# Altium PCB dieukhien.PcbDoc (part 1 of 3)
Units mil, origin at the board's own origin, x right, y up, seen from the top; angles counter-clockwise.
Board outline 7680 x 3350 mil, 2 copper layers (Top Layer, Bottom Layer); 551 components, 172 nets, 1771 pads, 0 vias.
Unrouted connection lines stored in the file: 181.
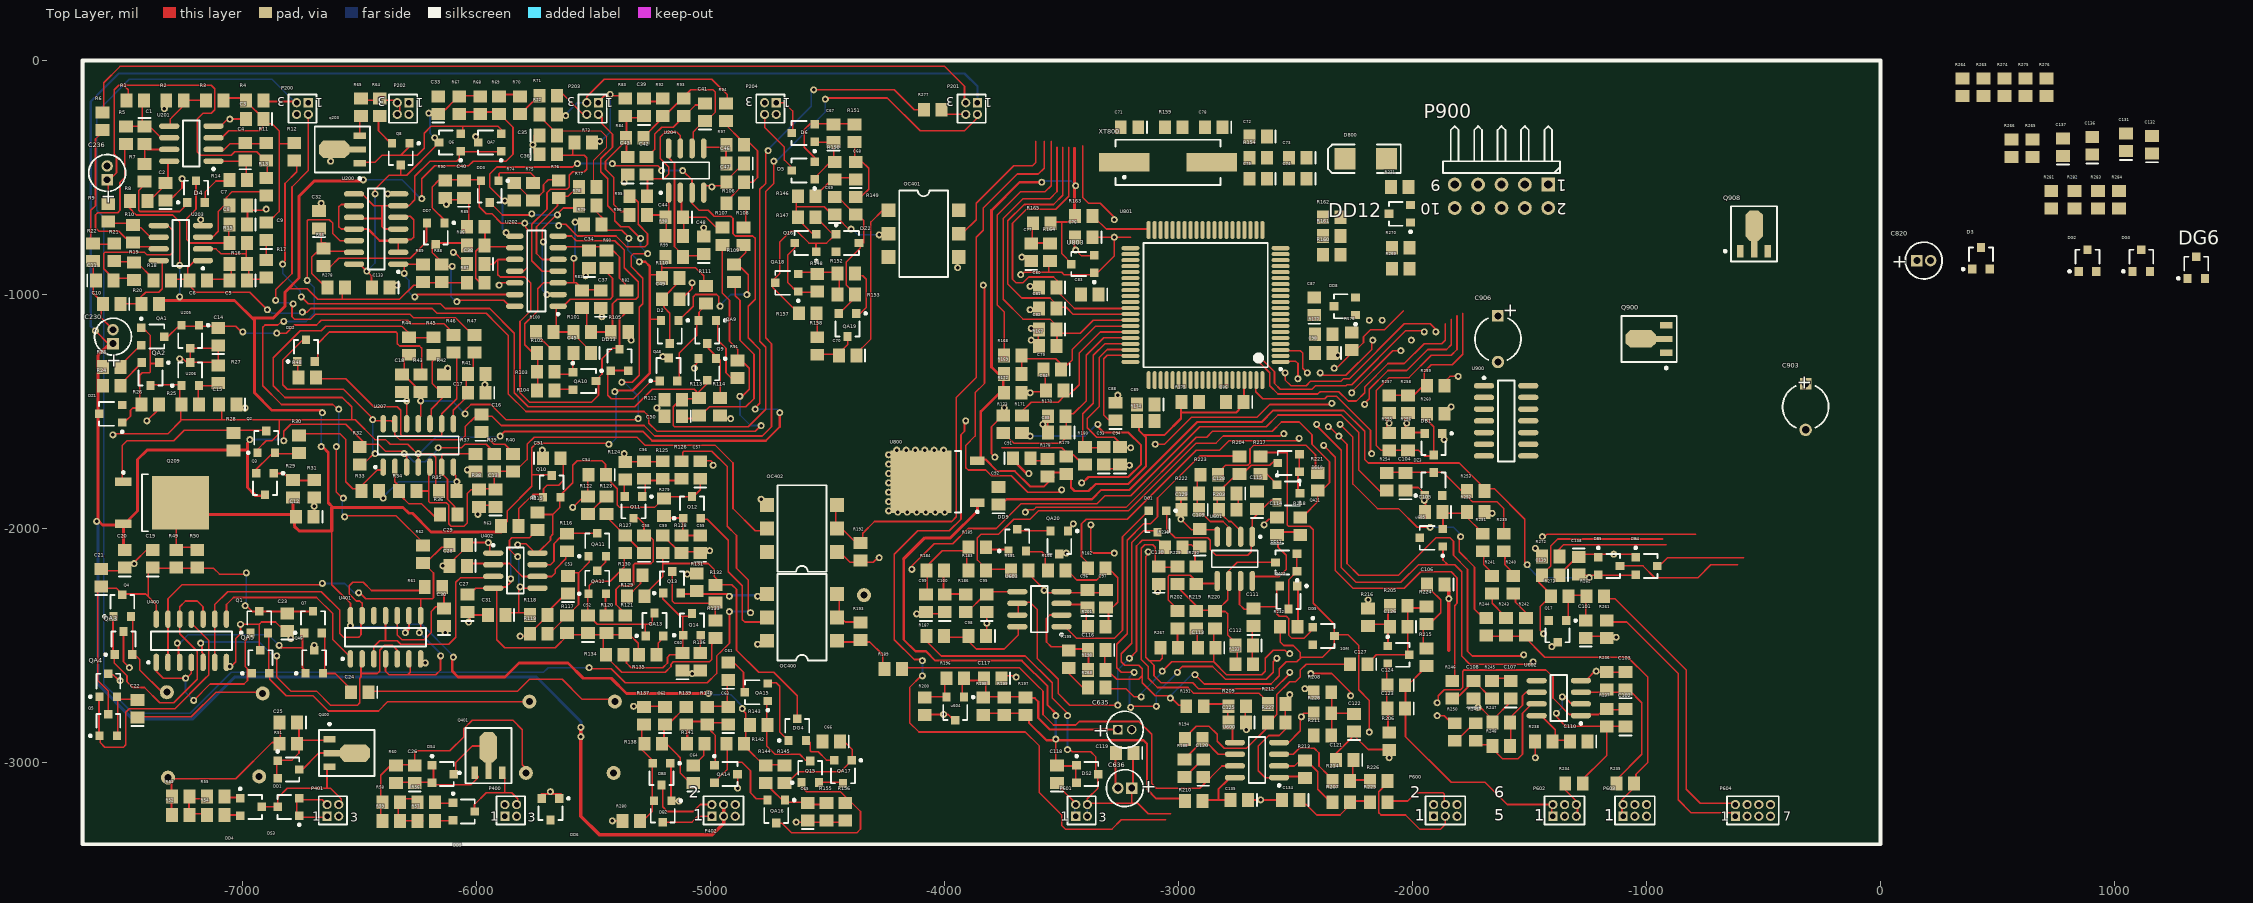
[diagram p0: Top Layer view]
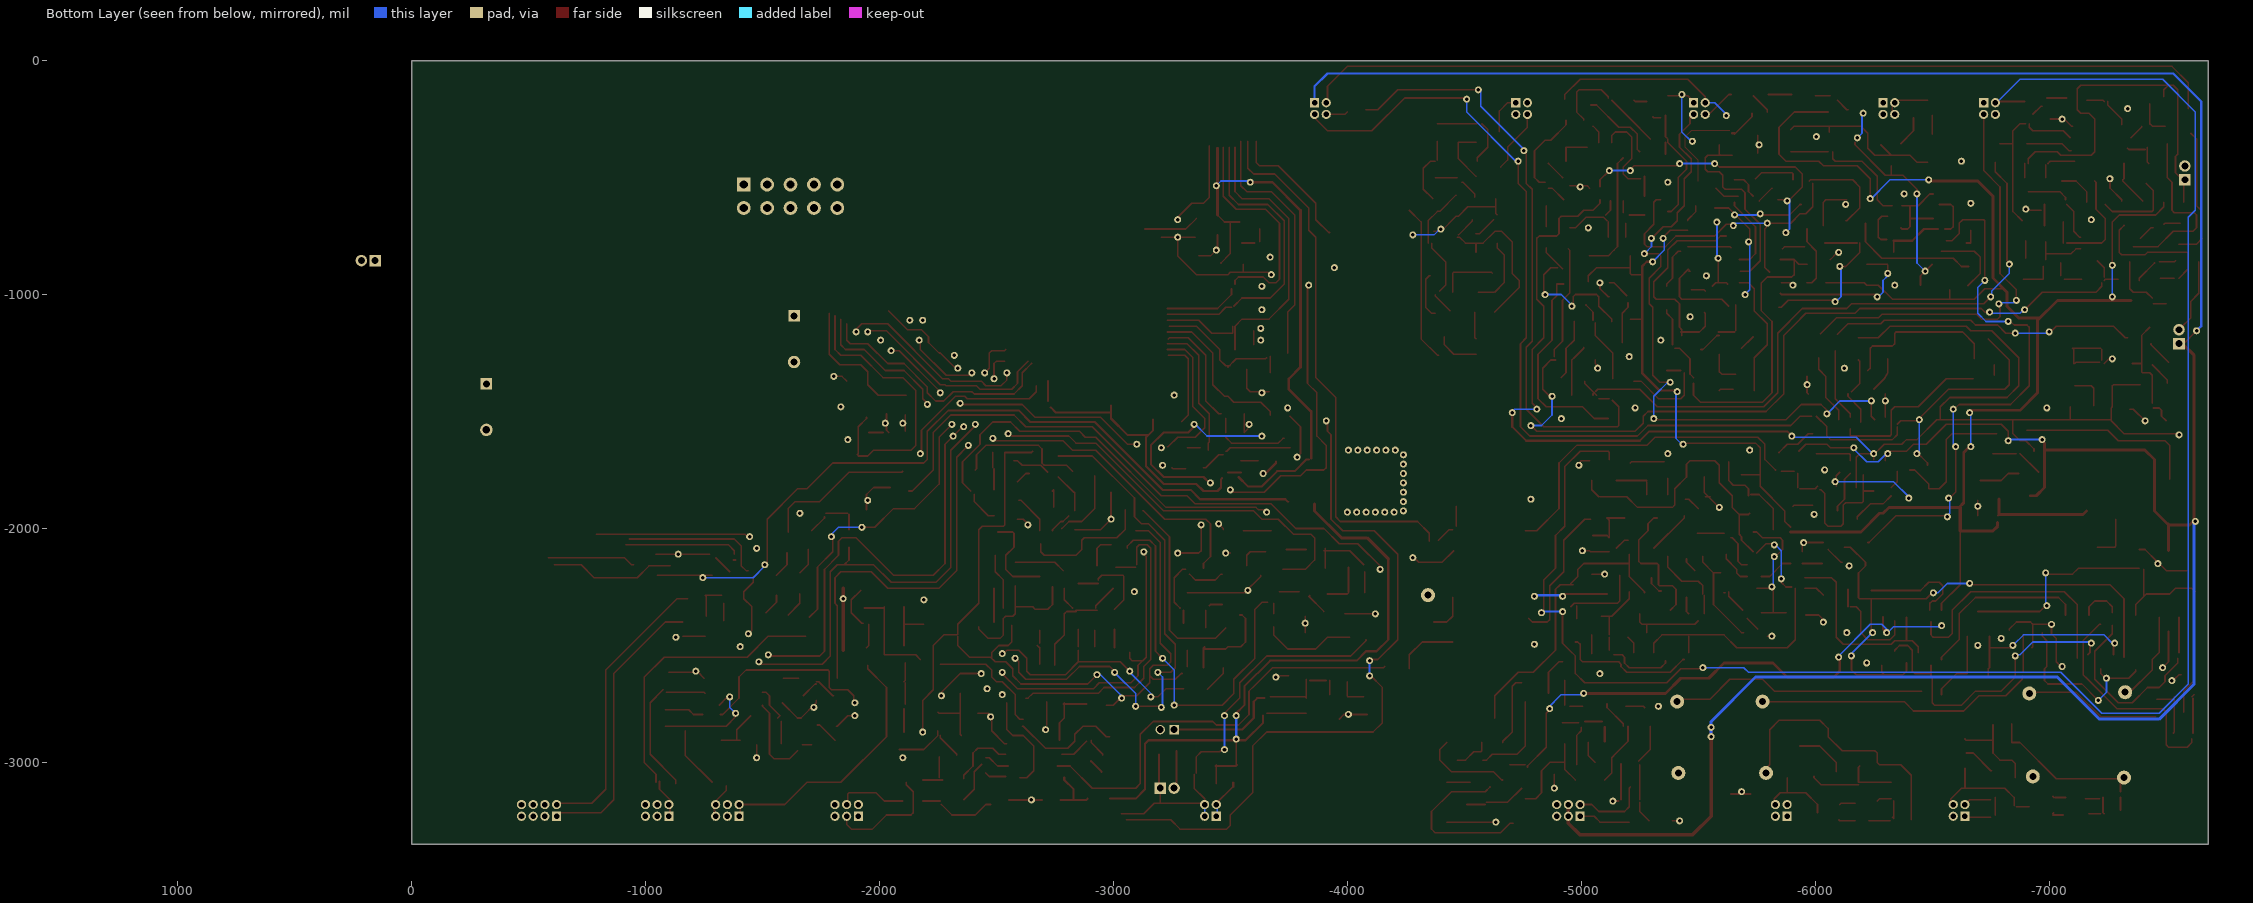
[diagram p1: Bottom Layer view, seen from below]

## Layer stack, top to bottom
Top Layer: signal copper 1.4
Dielectric: dielectric 12.6, FR-4, Dk 4.8
Bottom Layer: signal copper 1.4

## Board outline
-7680,0 0,0 0,-3350 -7680,-3350 -7680,0

## Design rules (kind name [scope] priority, off if disabled: settings)
Clearance [All] p1: gap=2
PolygonConnect [All] p1: connectstyle=Relief reliefconductorwidth=10 reliefentries=4 polygonreliefangle="90 Angle"
RoomDefinition dieukhien [InComponentClass('dieukhien')] p1: confinementstyle=ConfineIn formatcopy=TRUE lockcomponents=FALSE outline 45,-3290 290,-3290 290,-3040 45,-3040
RoutingVias [All] p1: holewidth=28 width=50 viastyle="Through Hole" minholewidth=28 minwidth=50 maxholewidth=28 maxwidth=50
SilkscreenOverComponentPads [All] p1: minsilkscreentomaskgap=10
SolderMaskExpansion [All] p1: expansion=4
TestPointUsage [All] p1: valid=0 allowmultiple=FALSE
Testpoint [All] p1: side=15 testpointundercomponent=TRUE minsize=40 maxsize=100 preferedsize=60 minholesize=0 maxholesize=40 preferedholesize=32 testpointgrid=1 style=1023 order=0123456789
Width [All] p1: maxlimit=10 minlimit=10 preferedwidth=10
23 further rules are at their usual default settings.

## Components (designator, comment, footprint, x,y, rotation, side; value= is the part's Value field where it differs from the comment)
1GM "MMBTA06-1GM" SOT23A -2060,-2540 r270 top
C1 "Cap" C0805 -7420,-320 r270 top
C2 "Cap" C0805 -7330,-560 r90 top
C3 "Cap" C0805 -6950,-250 r180 top
C4 "Cap" C0805 -6990,-390 r90 top
C5 "Cap" C0805 -7020,-940 r180 top
C6 "Cap" C0805 -7190,-940 r0 top
C7 "Cap" C0805 -7020,-620 r180 top
C8 "Cap" C0805 -7020,-700 r180 top
C9 "Cap" C0805 -6900,-730 r90 top
C10 "Cap" C0805 -7560,-1040 r180 top
C11 "Cap" C0805 -7590,-940 r0 top
C12 "Cap" C0805 -6735,-1950 r180 top
C13 "Cap" C0805 -5920,-1870 r90 top
C14 "Cap" C0805 -7105,-1180 r90 top
C15 "Cap" C0805 -7065,-1470 r180 top
C16 "Cap" C0805 -5980,-1550 r90 top
C17 "Cap" C0805 -6000,-1420 r180 top
C18 "Cap" C0805 -6320,-1380 r90 top
C19 "Cap" C0805 -7385,-2130 r90 top
C20 "Cap" C0805 -7505,-2130 r90 top
C21 "Cap" C0805 -7605,-2210 r90 top
C22 "Cap" C0805 -7450,-2770 r90 top
C23 "Cap" C0805 -6810,-2400 r90 top
C24 "Cap" C0805 -6500,-2700 r180 top
C25 "Cap" C0805 -6805,-2830 r180 top
C26 "Cap" C0805 -6265,-3050 r90 top
C27 "Cap" C0805 -6040,-2320 r90 top
C28 "Cap" C0805 -6080,-2160 r180 top
C29 "Cap" C0805 -6080,-2070 r180 top
C30 "Cap" C0805 -6140,-2380 r90 top
C31 "Cap" C0805 -5915,-2370 r180 top
C32 "Cap" C0805 -6675,-680 r90 top
C33 "Cap" C0805 -6165,-190 r90 top
C34 "Cap" C0805 -5520,-850 r90 top
C35 "Cap" C0805 -5695,-320 r0 top
C36 "Cap" C0805 -5695,-400 r0 top
C37 "Cap" C0805 -5470,-1020 r90 top
C38 "Cap" C0805 -6005,-870 r180 top
C39 "Cap" C0805 -5285,-200 r90 top
C40 "Cap" C0805 -6055,-550 r90 top
C41 "Cap" C0805 -5025,-220 r90 top
C42 "Cap" C0805 -5275,-450 r90 top
C43 "Cap" C0805 -5355,-450 r90 top
C44 "Cap" C0805 -5155,-670 r180 top
C45 "Cap" C0805 -5550,-1250 r180 top
C46 "Cap" C0805 -4895,-440 r180 top
C47 "Cap" C0805 -4895,-520 r180 top
C48 "Cap" C0805 -5030,-790 r90 top
C49 "Cap" C0805 -5170,-1020 r180 top
C50 "Cap" C0805 -5160,-1520 r180 top
C51 "Cap" C0805 -5680,-1700 r0 top
C52 "Cap" C0805 -5525,-2410 r90 top
C53 "Cap" C0805 -5610,-2240 r90 top
C54 "Cap" C0805 -5485,-1770 r180 top
C55 "Cap" C0805 -5045,-2067.4 r90 top
C56 "Cap" C0805 -5285,-1750 r90 top
C57 "Cap" C0805 -5045,-1750 r90 top
C58 "Cap" C0805 -5285,-2067.4 r90 top
C59 "Cap" C0805 -5205,-2067.4 r90 top
C60 "Cap" C0805 -5120,-2570 r90 top
C61 "Cap" C0805 -4925,-2610 r90 top
C62 "Cap" C0805 -5195,-2800 r90 top
C63 "Cap" C0805 -4925,-2800 r90 top
C64 "Cap" C0805 -5075,-3050 r90 top
C65 "Cap" C0805 -4585,-3210 r90 top
C66 "Cap" C0805 -4485,-2910 r180 top
C67 "Cap" C0805 -4475,-310 r90 top
C68 "Cap" C0805 -4380,-470 r90 top
C69 "Cap" C0805 -4470,-620 r90 top
C70 "Cap" C0805 -4415,-1260 r180 top
C71 "Cap" C0805 -3210,-285 r180 top
C72 "Cap" C0805 -2660,-325 r180 top
C73 "Cap" C0805 -2490,-415 r180 top
C74 "Cap" C0805 -2490,-505 r180 top
C75 "Cap" C0805 -2660,-505 r180 top
C76 "Cap" C0805 -3405,-755 r180 top
C77 "Cap" C0805 -3630,-820 r90 top
C78 "Cap" C0805 -2850,-285 r180 top
C79 "Cap" C0805 -3540,-1320 r180 top
C80 "Cap" C0805 -3560,-970 r180 top
C81 "Cap" C0805 -3560,-1060 r180 top
C82 "Cap" C0805 -3560,-1150 r180 top
C83 "Cap" C0805 -3380,-1000 r180 top
C84 "Cap" C0805 -3530,-1410 r180 top
C85 "Cap" C0805 -3520,-1590 r180 top
C86 "Cap" C0805 -2760,-1460 r180 top
C87 "Cap" C0805 -2420,-1050 r90 top
C88 "Cap" C0805 -3270,-1500 r90 top
C89 "Cap" C0805 -3140,-1470 r180 top
C90 "Cap" C0805 -2380,-1250 r180 top
C91 "Cap" C0805 -3670,-1700 r0 top
C92 "Cap" C0805 -3770,-1860 r90 top
C93 "Cap" C0805 -3320,-1690 r90 top
C94 "Cap" C0805 -3250,-1690 r90 top
C95 "Cap" C0805 -3820,-2320 r90 top
C96 "Cap" C0805 -3390,-2300 r90 top
C97 "Cap" C0805 -3310,-2300 r90 top
C98 "Cap" C0805 -3860,-2460 r180 top
C99 "Cap" C0805 -4080,-2320 r90 top
C100 "Cap" C0805 -4000,-2320 r90 top
C101 "Cap" C0805 -1260,-2430 r90 top
C102 "Cap" C0805 -1090,-2810 r90 top
C103 "Cap" C0805 -1090,-2650 r90 top
C104 "Cap" C0805 -2030,-1800 r90 top
C105 "Cap" C0805 -1910,-1930 r180 top
C106 "Cap" C0805 -1900,-2240 r180 top
C107 "Cap" C0805 -1580,-2690 r90 top
C108 "Cap" C0805 -1740,-2690 r90 top
C109 "Cap" C0805 -2910,-2040 r90 top
C110 "Cap" C0805 -1290,-2910 r180 top
C111 "Cap" C0805 -2680,-2380 r90 top
C112 "Cap" C0805 -2720,-2500 r180 top
C113 "Cap" C0805 -2880,-2510 r180 top
C114 "Cap" C0805 -2580,-1990 r90 top
C115 "Cap" C0805 -2665,-1880 r90 top
C116 "Cap" C0805 -3350,-2520 r180 top
C117 "Cap" C0805 -3795,-2640 r180 top
C118 "Cap" C0805 -3520,-3050 r90 top
C119 "Cap" C0805 -3230,-2960 r180 top
C120 "Cap" C0805 -2895,-3025 r90 top
C121 "Cap" C0805 -2290,-2990 r180 top
C122 "Cap" C0805 -2250,-2830 r90 top
C123 "Cap" C0805 -2070,-2770 r180 top
C124 "Cap" C0805 -2070,-2670 r180 top
C125 "Cap" C0805 -2750,-2830 r180 top
C126 "Cap" C0805 -2060,-2420 r180 top
C127 "Cap" C0805 -2230,-2580 r180 top
C128 "Cap" C0805 -2790,-1850 r180 top
C129 "Cap" C0805 -2950,-1920 r180 top
C130 "Cap" C0805 -3085,-2200 r90 top
C131 "Cap" C0805 1050,-350 r90 top
C132 "Cap" C0805 1160,-360 r90 top
C133 "Cap" C0805 -6410,-970 r180 top
C134 "Cap" C0805 -2520,-3160 r180 top
C135 "Cap" C0805 -2740,-3160 r180 top
C136 "Cap" C0805 905,-365 r90 top
C137 "Cap" C0805 780,-370 r90 top
C138 "Cap" C0805 -1290,-2160 r270 top
C139 "Cap" C0805 -1410,-2200 r180 top
C230 "Cap Pol1" A#1 -7555,-1180 r90 top
C236 "Cap Pol1" A#1 -7580,-480 r90 top
C635 "Cap Pol1" A#2 -3230,-2860 r0 top
C636 "Cap Pol1" A#1 -3230,-3110 r180 top
C820 "Cap Pol1" A#1 185,-855 r0 top
C903 "Cap Pol1" CAPPR5-5x5 -320,-1480 r270 top
C906 "Cap Pol1" CAPPR5-5x5 -1635,-1190 r270 top
D2 "BAV99-A7W" SOT-23B -5175,-1160 r180 top
D3 "BAV199-JYW" SOT23A 430,-845 r0 top
D4 "BAV199-JYW" SOT23A -7200,-560 r0 top
D5 "BAV99-A7W" SOT-23B -4605,-470 r90 top
D6 "BAV99-A7W" SOT-23B -4605,-310 r90 top
D800 "1SMB5.0AT3-KE" SMB -2200,-420 r180 top
DB1 "BAT54S-WV4" SOT23A -1910,-1640 r180 top
DB2 "BAT54S-WV4" SOT23A -5205,-3210 r180 top
DB3 "BAT54S-WV4" SOT23A -5210,-3050 r180 top
DB4 "BAT54S-WV4" SOT23A -1000,-2160 r270 top
DB5 "BAT54S-WV4" SOT23A -1160,-2160 r270 top
DD1 "BAV70-A4" SOT23A -6805,-3190 r90 top
DD2 "BAV70-A4" SOT23A -6730,-1240 r0 top
DD3 "BAV70-A4" SOT23A -5945,-560 r180 top
DD4 "BAV70-A4" SOT23A -6965,-3190 r270 top
DD5 "BAV70-A4" SOT23A -6055,-3210 r270 top
DD6 "BAV70-A4" SOT23A -5685,-3200 r180 top
DD7 "BAV70-A4" SOT23A -6175,-740 r180 top
DD8 "BAV70-A4" SOT23A -2290,-1050 r90 top
DD9 "BAV70-A4" SOT23A -3690,-2050 r0 top
DD10 "BAV70-A4" SOT23A -2530,-1720 r90 top
DD11 "BAV70-A4" SOT23A -2540,-2145 r90 top
DD12 "BAV70-A4" SOT23A -2055,-655 r90 top
DD13 "BAV70-A4" SOT23A -5390,-1280 r0 top
DG1 "BAW56-A1" SOT23A -3090,-1970 r180 top
DG2 "BAW56-A1" SOT23A 885,-855 r0 top
DG3 "BAW56-A1" SOT23A 1115,-855 r0 top
DG4 "BAW56-A1" SOT23A -4630,-2860 r0 top
DG5 "BAW56-A1" SOT23A -2380,-2460 r270 top
DG6 "BAW56-A1" SOT23A 1350,-885 r0 top
DS2 "BAT54A-WV3" SOT23A -3390,-3050 r270 top
DS3 "BAT54A-WV3" SOT23A -6805,-3030 r270 top
DS4 "BAT54A-WV3" SOT23A -6145,-3050 r270 top
DZ1 "8G-5v6" SOT-23B -7565,-1510 r90 top
DZ2 "8G" SOT-23B -4415,-780 r270 top
DZ3 "8G" SOT-23B -1910,-1810 r0 top
OC400 "cny17f-2" SMD-6 -4460,-2480 r180 top
OC401 "cny17f-2" SMD-6 -4240,-640 r0 top locked
OC402 "cny17f-2" SMD-6 -4460,-2100 r180 top
P200 "MHDR2X2" MHDR2X2 -6720,-180 r180 top
P201 "MHDR2X2" MHDR2X2 -3860,-180 r180 top
P202 "PFC_G" MHDR2X2 -6290,-180 r180 top
P203 "MHDR2X2" MHDR2X2 -5480,-180 r180 top
P204 "ACIN" MHDR2X2 -4720,-180 r180 top
P400 "MHDR2X2" MHDR2X2 -5880,-3230 r0 top
P401 "MHDR2X2" MHDR2X2 -6640,-3230 r0 top
P402 "Header 3X2" MHDR2X3 -4995,-3230 r0 top
P600 "Header 3X2" MHDR2X3 -1910,-3230 r0 top
P601 "MHDR2X2" MHDR2X2 -3440,-3230 r0 top
P602 "Header 3X2" MHDR2X3 -1400,-3230 r0 top
P603 "Header 3X2" MHDR2X3 -1100,-3230 r0 top
P604 "MHDR2X4" MHDR2X4 -620,-3230 r0 top
P900 "Header 5X2H" HDR2X5H -1420,-530 r180 top
Q1 "MMBT2222A-1P" SOT23A -6930,-2400 r0 top
Q2 "MMBT2222A-1P" SOT23A -6900,-1630 r0 top
Q3 "MMBT2222A-1P" SOT23A -6905,-1810 r180 top
Q4 "MMBT2222A-1P" SOT23A -7515,-2330 r0 top
Q5 "MMBT2222A-1P" SOT23A -7575,-2840 r0 top
Q6 "MMBT2222A-1P" SOT23A -6115,-350 r90 top
Q7 "MMBT2222A-1P" SOT23A -6700,-2400 r0 top
Q8 "MMBT2222A-1P" SOT23A -6325,-400 r180 top
Q9 "MMBT2222A-1P" SOT23A -5015,-1320 r180 top
Q10 "MMBT2222A-1P" SOT23A -5680,-1820 r0 top
Q11 "MMBT2222A-1P" SOT23A -5330,-1910 r180 top
Q12 "MMBT2222A-1P" SOT23A -5080,-1910 r0 top
Q13 "MMBT2222A-1P" SOT23A -5165,-2230 r0 top
Q14 "MMBT2222A-1P" SOT23A -5080,-2410 r0 top
Q15 "MMBT2222A-1P" SOT23A -4575,-3040 r0 top
Q16 "MMBT2222A-1P" SOT23A -4595,-780 r90 top
Q17 "MMBT2222A-1P" SOT23A -1380,-2440 r180 top
q203 "BC869-CEC" SOT89 -6555,-380 r90 top
Q209 "J32CG" TO228P960-3_4L -7345,-1890 r0 top
Q400 "BCX53-AH" SOT89 -6575,-2960 r270 top
Q401 "BCX53-AH" SOT89 -5950,-2990 r0 top
Q900 "BCX53-AH" SOT89 -970,-1190 r90 top
Q908 "BC869-CEC" SOT89 -540,-760 r0 top
QA1 "2FN" SOT-23B -7385,-1180 r270 top
QA2 "2FN" SOT-23B -7395,-1340 r180 top
QA3 "2FN" SOT-23B -7510,-2490 r0 top
QA4 "2FN" SOT-23B -7575,-2670 r0 top
QA5 "2FN" SOT-23B -6925,-2570 r0 top
QA6 "2FN" SOT-23B -6695,-2570 r0 top
QA7 "2FN" SOT-23B -5945,-350 r90 top
QA8 "2FN" SOT-23B -5180,-1320 r0 top
QA9 "2FN" SOT-23B -5015,-1160 r180 top
QA10 "2FN" SOT-23B -5540,-1370 r270 top
QA11 "2FN" SOT-23B -5485,-2070 r0 top
QA12 "2FN" SOT-23B -5485,-2230 r0 top
QA13 "2FN" SOT-23B -5240,-2410 r0 top
QA14 "2FN" SOT-23B -4935,-3050 r270 top
QA15 "2FN" SOT-23B -4805,-2700 r90 top
QA16 "2FN" SOT-23B -4720,-3210 r180 top
QA17 "2FN" SOT-23B -4435,-3040 r180 top
QA18 "2FN" SOT-23B -4675,-950 r90 top
QA19 "2FN" SOT-23B -4415,-1130 r180 top
QA20 "2FN" SOT-23B -3510,-2060 r180 top
QA21 "2FN" SOT-23B -2530,-1850 r270 top
QA22 "2FN" SOT-23B -2530,-2295 r180 top
R1 "Res2" 2012[0805] -7460,-170 r0 top
R2 "Res2" 2012[0805] -7290,-170 r0 top
R3 "Res2" 2012[0805] -7120,-170 r0 top
R4 "Res2" 2012[0805] -6950,-170 r0 top
R5 "Res2" 2012[0805] -7500,-320 r90 top
R6 "Res2" 2012[0805] -7600,-260 r90 top
R7 "Res2" 2012[0805] -7420,-480 r270 top
R8 "Res2" 2012[0805] -7445,-600 r0 top
R9 "Res2" 2012[0805] -7575,-650 r90 top
R10 "Res2" 2012[0805] -7470,-740 r90 top
R11 "Res2" 2012[0805] -6900,-390 r90 top
R12 "Res2" 2012[0805] -6780,-390 r90 top
R13 "Res2" 2012[0805] -6900,-540 r90 top
R14 "Res2" 2012[0805] -7020,-510 r180 top
R15 "Res2" 2012[0805] -7020,-780 r180 top
R16 "Res2" 2012[0805] -7020,-870 r180 top
R17 "Res2" 2012[0805] -6900,-890 r270 top
R18 "Res2" 2012[0805] -7345,-940 r180 top
R19 "Res2" 2012[0805] -7465,-900 r270 top
R20 "Res2" 2012[0805] -7395,-1040 r180 top
R21 "Res2" 2012[0805] -7550,-820 r90 top
R22 "Res2" 2012[0805] -7640,-820 r90 top
R23 "Res2" 2012[0805] -7560,-1310 r180 top
R24 "Res2" 2012[0805] -7560,-1390 r180 top
R25 "Res2" 2012[0805] -7225,-1470 r180 top
R26 "Res2" 2012[0805] -7395,-1470 r180 top
R27 "Res2" 2012[0805] -7105,-1340 r90 top
R28 "Res2" 2012[0805] -7040,-1630 r90 top
R29 "Res2" 2012[0805] -6785,-1830 r90 top
R30 "Res2" 2012[0805] -6760,-1640 r90 top
R31 "Res2" 2012[0805] -6695,-1830 r90 top
R32 "Res2" 2012[0805] -6500,-1690 r90 top
R33 "Res2" 2012[0805] -6455,-1840 r180 top
R34 "Res2" 2012[0805] -6295,-1840 r180 top
R35 "Res2" 2012[0805] -6125,-1840 r180 top
R36 "Res2" 2012[0805] -6120,-1940 r180 top
R37 "Res2" 2012[0805] -6005,-1720 r90 top
R38 "Res2" 2012[0805] -5990,-1870 r90 top
R39 "Res2" 2012[0805] -5925,-1720 r90 top
R40 "Res2" 2012[0805] -5845,-1720 r90 top
R41 "Res2" 2012[0805] -6000,-1340 r0 top
R42 "Res2" 2012[0805] -6140,-1380 r90 top
R43 "Res2" 2012[0805] -6240,-1380 r90 top
R44 "Res2" 2012[0805] -6290,-1220 r90 top
R45 "Res2" 2012[0805] -6185,-1220 r90 top
R46 "Res2" 2012[0805] -6100,-1210 r90 top
R47 "Res2" 2012[0805] -6010,-1210 r90 top
R48 "Res2" 2012[0805] -6725,-1355 r180 top
R49 "Res2" 2012[0805] -7285,-2130 r90 top
R50 "Res2" 2012[0805] -7195,-2130 r90 top
R51 "Res2" 2012[0805] -6805,-2920 r0 top
R52 "Res2" 2012[0805] -7265,-3225 r180 top
R53 "Res2" 2012[0805] -7265,-3145 r180 top
R54 "Res2" 2012[0805] -7115,-3225 r180 top
R55 "Res2" 2012[0805] -7115,-3145 r180 top
R56 "Res2" 2012[0805] -6215,-3170 r180 top
R57 "Res2" 2012[0805] -6215,-3250 r180 top
R58 "Res2" 2012[0805] -6365,-3170 r180 top
R59 "Res2" 2012[0805] -6365,-3250 r0 top
R60 "Res2" 2012[0805] -6345,-3050 r90 top
R61 "Res2" 2012[0805] -6185,-2250 r0 top
R62 "Res2" 2012[0805] -6230,-2110 r90 top
R63 "Res2" 2012[0805] -5860,-1990 r180 top
R64 "Res2" 2012[0805] -6415,-200 r90 top
R65 "Res2" 2012[0805] -6495,-200 r90 top
R66 "Res2" 2012[0805] -6655,-840 r90 top
R67 "Res2" 2012[0805] -6075,-190 r90 top
R68 "Res2" 2012[0805] -5985,-190 r90 top
R69 "Res2" 2012[0805] -5905,-190 r90 top
R70 "Res2" 2012[0805] -5815,-190 r90 top
R71 "Res2" 2012[0805] -5695,-150 r0 top
R72 "Res2" 2012[0805] -5695,-230 r0 top
R73 "Res2" 2012[0805] -5545,-350 r180 top
R74 "Res2" 2012[0805] -5840,-560 r90 top
R75 "Res2" 2012[0805] -5760,-560 r90 top
R76 "Res2" 2012[0805] -5650,-550 r90 top
R77 "Res2" 2012[0805] -5525,-540 r180 top
R78 "Res2" 2012[0805] -5525,-620 r180 top
R79 "Res2" 2012[0805] -5505,-700 r180 top
R80 "Res2" 2012[0805] -5445,-850 r90 top
R81 "Res2" 2012[0805] -5550,-1020 r90 top
R82 "Res2" 2012[0805] -5360,-1020 r90 top
R83 "Res2" 2012[0805] -5365,-200 r90 top
R84 "Res2" 2012[0805] -5325,-330 r180 top
R85 "Res2" 2012[0805] -6005,-710 r180 top
R86 "Res2" 2012[0805] -6005,-790 r180 top
R87 "Res2" 2012[0805] -6005,-950 r180 top
R88 "Res2" 2012[0805] -6150,-910 r90 top
R89 "Res2" 2012[0805] -6230,-910 r90 top
R90 "Res2" 2012[0805] -6135,-550 r90 top
R91 "Res2" 2012[0805] -4885,-1320 r90 top
R92 "Res2" 2012[0805] -5205,-200 r90 top
R93 "Res2" 2012[0805] -5115,-200 r90 top
R94 "Res2" 2012[0805] -4935,-220 r90 top
R95 "Res2" 2012[0805] -5310,-580 r180 top
R96 "Res2" 2012[0805] -5310,-660 r180 top
R97 "Res2" 2012[0805] -4895,-360 r180 top
R98 "Res2" 2012[0805] -5155,-750 r180 top
R99 "Res2" 2012[0805] -5155,-840 r180 top
R100 "Res2" 2012[0805] -5710,-1160 r180 top
R101 "Res2" 2012[0805] -5550,-1160 r180 top
R102 "Res2" 2012[0805] -5705,-1250 r180 top
R103 "Res2" 2012[0805] -5705,-1330 r180 top
R104 "Res2" 2012[0805] -5705,-1410 r180 top
R105 "Res2" 2012[0805] -5390,-1160 r180 top
R106 "Res2" 2012[0805] -4895,-610 r180 top
R107 "Res2" 2012[0805] -4950,-750 r90 top
R108 "Res2" 2012[0805] -4860,-750 r90 top
R109 "Res2" 2012[0805] -4900,-910 r90 top
R110 "Res2" 2012[0805] -5170,-930 r180 top
R111 "Res2" 2012[0805] -5020,-1000 r90 top
R112 "Res2" 2012[0805] -5160,-1450 r180 top
R113 "Res2" 2012[0805] -5050,-1480 r90 top
R114 "Res2" 2012[0805] -4960,-1480 r90 top
R115 "Res2" 2012[0805] -5740,-1970 r90 top
R116 "Res2" 2012[0805] -5615,-2060 r90 top
R117 "Res2" 2012[0805] -5615,-2410 r90 top
R118 "Res2" 2012[0805] -5735,-2370 r180 top
R119 "Res2" 2012[0805] -5735,-2450 r180 top
R120 "Res2" 2012[0805] -5445,-2410 r90 top
R121 "Res2" 2012[0805] -5365,-2410 r90 top
R122 "Res2" 2012[0805] -5525,-1900 r90 top
R123 "Res2" 2012[0805] -5445,-1900 r90 top
R124 "Res2" 2012[0805] -5365,-1752.6 r90 top
R125 "Res2" 2012[0805] -5205,-1750 r90 top
R126 "Res2" 2012[0805] -5125,-1750 r90 top
R127 "Res2" 2012[0805] -5365,-2067.4 r90 top
R128 "Res2" 2012[0805] -5125,-2067.4 r90 top
R129 "Res2" 2012[0805] -5320,-2290 r180 top
R130 "Res2" 2012[0805] -5330,-2200 r180 top
R131 "Res2" 2012[0805] -5060,-2230 r90 top
R132 "Res2" 2012[0805] -4980,-2280 r90 top
R133 "Res2" 2012[0805] -4980,-2430 r90 top
R134 "Res2" 2012[0805] -5410,-2540 r180 top
R135 "Res2" 2012[0805] -5270,-2540 r180 top
R136 "Res2" 2012[0805] -5045,-2570 r90 top
R137 "Res2" 2012[0805] -5285,-2800 r90 top
R138 "Res2" 2012[0805] -5245,-2920 r180 top
R139 "Res2" 2012[0805] -5105,-2800 r90 top
R140 "Res2" 2012[0805] -5015,-2800 r90 top
R141 "Res2" 2012[0805] -5065,-2920 r180 top
R142 "Res2" 2012[0805] -4895,-2920 r180 top
R143 "Res2" 2012[0805] -4795,-2840 r180 top
R144 "Res2" 2012[0805] -4765,-3050 r90 top
R145 "Res2" 2012[0805] -4685,-3050 r90 top
R146 "Res2" 2012[0805] -4590,-580 r180 top
R147 "Res2" 2012[0805] -4590,-670 r180 top
R148 "Res2" 2012[0805] -4545,-950 r90 top
R149 "Res2" 2012[0805] -4380,-620 r90 top
R150 "Res2" 2012[0805] -4470,-470 r90 top
R151 "Res2" 2012[0805] -4385,-310 r90 top
R152 "Res2" 2012[0805] -4420,-910 r180 top
R153 "Res2" 2012[0805] -4420,-1000 r180 top
R154 "Res2" 2012[0805] -2660,-415 r180 top
R155 "Res2" 2012[0805] -4505,-3210 r90 top
R156 "Res2" 2012[0805] -4425,-3210 r90 top
R157 "Res2" 2012[0805] -4585,-1080 r180 top
R158 "Res2" 2012[0805] -4545,-1220 r90 top
R159 "Res2" 2012[0805] -3020,-285 r180 top
R160 "Res2" 2012[0805] -2345,-830 r180 top
R161 "Res2" 2012[0805] -2345,-750 r180 top
R162 "Res2" 2012[0805] -2345,-670 r180 top
R163 "Res2" 2012[0805] -3405,-665 r180 top
R164 "Res2" 2012[0805] -3550,-820 r90 top
R165 "Res2" 2012[0805] -3585,-695 r180 top
R166 "Res2" 2012[0805] -3520,-2180 r180 top
R167 "Res2" 2012[0805] -3560,-1220 r180 top
R168 "Res2" 2012[0805] -3710,-1260 r180 top
R169 "Res2" 2012[0805] -3710,-1340 r180 top
R170 "Res2" 2012[0805] -3520,-1520 r180 top
R171 "Res2" 2012[0805] -3670,-1555 r90 top
R172 "Res2" 2012[0805] -3710,-1420 r180 top
R173 "Res2" 2012[0805] -3750,-1555 r90 top
R174 "Res2" 2012[0805] -3140,-1540 r180 top
R175 "Res2" 2012[0805] -2950,-1460 r180 top
R176 "Res2" 2012[0805] -2260,-1200 r90 top
R177 "Res2" 2012[0805] -2380,-1170 r180 top
R178 "Res2" 2012[0805] -3560,-1740 r90 top
R179 "Res2" 2012[0805] -3480,-1730 r90 top
R180 "Res2" 2012[0805] -3400,-1690 r90 top
R181 "Res2" 2012[0805] -3680,-2180 r180 top
R182 "Res2" 2012[0805] -3350,-2170 r180 top
R183 "Res2" 2012[0805] -3860,-2180 r180 top
R184 "Res2" 2012[0805] -4040,-2180 r180 top
R185 "Res2" 2012[0805] -3860,-2080 r180 top
R186 "Res2" 2012[0805] -3910,-2320 r90 top
R187 "Res2" 2012[0805] -4040,-2460 r180 top
R188 "Res2" 2012[0805] -2975,-3025 r90 top
R189 "Res2" 2012[0805] -4220,-2600 r180 top
R190 "Res2" 2012[0805] -3350,-2605 r180 top
R191 "Res2" 2012[0805] -2930,-2760 r180 top
R192 "Res2" 2012[0805] -4360,-2100 r90 top
R193 "Res2" 2012[0805] -4360,-2440 r90 top
R194 "Res2" 2012[0805] -2935,-2900 r180 top
R195 "Res2" 2012[0805] -3470,-2560 r90 top
R196 "Res2" 2012[0805] -3955,-2640 r180 top
R197 "Res2" 2012[0805] -3655,-2760 r90 top
R198 "Res2" 2012[0805] -3835,-2760 r90 top
R199 "Res2" 2012[0805] -3745,-2760 r90 top
R200 "Res2" 2012[0805] -4085,-2760 r90 top
R201 "Res2" 2012[0805] -3350,-2420 r180 top
R202 "Res2" 2012[0805] -3005,-2390 r90 top
R203 "Res2" 2012[0805] -2790,-1920 r180 top
R204 "Res2" 2012[0805] -2740,-1730 r270 top
R205 "Res2" 2012[0805] -2060,-2330 r180 top
R206 "Res2" 2012[0805] -2100,-2910 r90 top
R207 "Res2" 2012[0805] -2305,-3170 r180 top
R208 "Res2" 2012[0805] -2385,-2700 r180 top
R209 "Res2" 2012[0805] -2750,-2760 r180 top
R210 "Res2" 2012[0805] -2935,-3165 r180 top
R211 "Res2" 2012[0805] -2385,-2885 r180 top
R212 "Res2" 2012[0805] -2580,-2750 r180 top
R213 "Res2" 2012[0805] -2460,-3030 r90 top
R214 "Res2" 2012[0805] -2305,-3080 r180 top
R215 "Res2" 2012[0805] -1940,-2550 r270 top
R216 "Res2" 2012[0805] -2190,-2380 r90 top
R217 "Res2" 2012[0805] -2650,-1730 r270 top
R218 "Res2" 2012[0805] -2480,-1990 r90 top
R219 "Res2" 2012[0805] -2925,-2390 r90 top
R220 "Res2" 2012[0805] -2845,-2390 r90 top
R221 "Res2" 2012[0805] -2405,-1800 r90 top
R222 "Res2" 2012[0805] -2950,-1850 r180 top
R223 "Res2" 2012[0805] -2870,-1770 r180 top
R224 "Res2" 2012[0805] -1940,-2370 r270 top
R225 "Res2" 2012[0805] -2145,-3170 r180 top
R226 "Res2" 2012[0805] -2145,-3080 r180 top
R227 "Res2" 2012[0805] -2580,-2830 r180 top
R228 "Res2" 2012[0805] -2385,-2790 r180 top
R229 "Res2" 2012[0805] -3005,-2200 r90 top
R230 "Res2" 2012[0805] -2925,-2200 r90 top
R231 "Res2" 2012[0805] -3020,-2080 r180 top
R232 "Res2" 2012[0805] -2530,-2420 r180 top
R233 "Res2" 2012[0805] -2720,-2580 r180 top
R234 "Res2" 2012[0805] -1310,-3090 r180 top
R235 "Res2" 2012[0805] -1090,-3090 r0 top
R236 "Res2" 2012[0805] -1170,-2650 r90 top
R237 "Res2" 2012[0805] -1170,-2810 r90 top
R238 "Res2" 2012[0805] -1440,-2910 r180 top
R239 "Res2" 2012[0805] -1610,-2060 r90 top
R240 "Res2" 2012[0805] -1570,-2240 r90 top
R241 "Res2" 2012[0805] -1660,-2240 r90 top
R242 "Res2" 2012[0805] -1515,-2420 r90 top
R243 "Res2" 2012[0805] -1600,-2420 r90 top
R244 "Res2" 2012[0805] -1685,-2420 r90 top
R245 "Res2" 2012[0805] -1660,-2690 r90 top
R246 "Res2" 2012[0805] -1830,-2690 r90 top
R247 "Res2" 2012[0805] -1620,-2830 r180 top
R248 "Res2" 2012[0805] -1620,-2930 r180 top
R249 "Res2" 2012[0805] -1730,-2870 r90 top
R250 "Res2" 2012[0805] -1820,-2870 r90 top
R251 "Res2" 2012[0805] -1700,-2060 r90 top
R252 "Res2" 2012[0805] -1730,-1930 r180 top
R253 "Res2" 2012[0805] -1730,-1840 r180 top
R254 "Res2" 2012[0805] -2110,-1800 r90 top
R255 "Res2" 2012[0805] -2100,-1630 r90 top
R256 "Res2" 2012[0805] -2020,-1630 r90 top
R257 "Res2" 2012[0805] -2100,-1470 r90 top
R258 "Res2" 2012[0805] -2020,-1470 r90 top
R259 "Res2" 2012[0805] -1900,-1390 r180 top
R260 "Res2" 2012[0805] -1900,-1510 r180 top
R261 "Res2" 2012[0805] -1170,-2430 r90 top
R262 "Res2" 2012[0805] -1220,-2290 r180 top
R263 "Res2" 2012[0805] 440,-115 r90 top
R264 "Res2" 2012[0805] 350,-115 r90 top
R265 "Res2" 2012[0805] 650,-375 r90 top
R266 "Res2" 2012[0805] 560,-375 r90 top
R267 "Res2" 2012[0805] -3040,-2510 r180 top
R268 "Res2" 2012[0805] -3350,-2680 r180 top
R269 "Res2" 2012[0805] -2050,-890 r180 top
R270 "Res2" 2012[0805] -2050,-800 r180 top
R271 "Res2" 2012[0805] -2055,-540 r180 top
R272 "Res2" 2012[0805] -1410,-2120 r180 top
R273 "Res2" 2012[0805] -1370,-2290 r180 top
R274 "Res2" 2012[0805] 530,-115 r90 top
R275 "Res2" 2012[0805] 620,-115 r90 top
R276 "Res2" 2012[0805] 710,-115 r90 top
R277 "Res2" 2012[0805] -4050,-210 r180 top
R278 "Res2" 2012[0805] -6600,-970 r180 top
R279 "Res2" 2012[0805] -5200,-1910 r90 top
R280 "Res2" 2012[0805] -5340,-3250 r180 top
R281 "Res2" 2012[0805] 730,-595 r90 top
R282 "Res2" 2012[0805] 830,-595 r90 top
R283 "Res2" 2012[0805] 930,-595 r90 top
R284 "Res2" 2012[0805] 1020,-595 r90 top
U200 "MC14584BG" SO14_N -6430,-720 r180 top
U201 "LM358D" 751-02_N -7220,-355 r180 top locked
U202 "LM339AD" 751A-02_L -5745,-900 r180 top
U203 "LM358D" 751-02_N -7265,-780 r180 top
U204 "LM358D" 751-02_N -5105,-470 r90 top
U205 "TAIU-TL431" SOT-23B -7225,-1180 r180 top
U206 "TL431" SOT-23B -7225,-1340 r0 top
U207 "LM339AD" 751A-02_L -6250,-1645 r90 top
U400 "MC14001BD" 751A-03_L -7220,-2480 r90 top
U401 "MC14013BD" 751A-03_L -6390,-2465 r90 top
U402 "NE555D" D008_N -5835,-2180 r0 top
U600 "MC34072D" SO8_N -2665,-2990 r180 top
U601 "LM358D" 751-02_N -2760,-2130 r270 top
U602 "LM358D" 751-02_N -1375,-2725 r180 top
U603 "LM358D" 751-02_N -3595,-2345 r180 top
u604 "RESET IC" SOT-23B -3955,-2770 r180 top
u605 "RESET IC" SOT-23B -1920,-2040 r90 top
U800 "MC33269DT-5.0" TO228P970-3_4L -4030,-1800 r180 top
U801 "MC9S12D64CFU" 841B_N -2885,-1045 r180 top locked
U803 "RESET IC" SOT-23B -3410,-870 r90 top
U900 "MC14584BG" SO14_N -1600,-1540 r0 top
XT800 "XTAL" HC49/4H_SMX -3045,-435 r0 top

## Footprints (in the part's own frame and the unit in brackets; to place one, negate y for a bottom-side part, rotate by r counter-clockwise, add the part's x,y. Pads: shape width x height; smd on the part's side, far side on the other; paste and mask are expansions set on the pad)
751-02_N [mm] "SOIC, 8-Leads, Body 4.9x3.9mm, Pitch 1.27mm, IPC Medium Density"
  oval 2.2x0.6 smd: 1(-2.4,1.905) 2(-2.4,0.635) 3(-2.4,-0.635) 4(-2.4,-1.905) 5(2.4,-1.905) 6(2.4,-0.635) 7(2.4,0.635) 8(2.4,1.905)
  silkscreen extent -2.53,-2.5 0.9,2.88, body extent -1.95,-2.45 1.95,2.45, height 1.75
751A-02_L [mm] "SOIC, 14-Leads, Body 8.7x3.9mm, Pitch 1.27mm, IPC High Density"
  oval 1.9x0.6 smd: 1(-2.35,3.81) 2(-2.35,2.54) 3(-2.35,1.27) 4(-2.35,0) 5(-2.35,-1.27) 6(-2.35,-2.54) 7(-2.35,-3.81) 8(2.35,-3.81) 9(2.35,-2.54) 10(2.35,-1.27) 11(2.35,0) 12(2.35,1.27) 13(2.35,2.54) 14(2.35,3.81)
  silkscreen extent -2.48,-4.4 1,4.78, body extent -1.95,-4.33 1.95,4.33, height 1.75
751A-03_L [mm] "SOIC, 14-Leads, Body 8.7x3.9mm, Pitch 1.27mm, IPC High Density"
  oval 1.9x0.6 smd: 1(-2.35,3.81) 2(-2.35,2.54) 3(-2.35,1.27) 4(-2.35,0) 5(-2.35,-1.27) 6(-2.35,-2.54) 7(-2.35,-3.81) 8(2.35,-3.81) 9(2.35,-2.54) 10(2.35,-1.27) 11(2.35,0) 12(2.35,1.27) 13(2.35,2.54) 14(2.35,3.81)
  silkscreen extent -2.47,-4.4 1,4.78, body extent -2,-4.38 2,4.38, height 1.75
841B_N [mm] "QFP, 80-Leads, Body 14 x 14mm, Pitch 0.65mm, IPC Medium Density"
  oval 1.95x0.45 smd: 1(-8.15,6.175) 2(-8.15,5.525) 3(-8.15,4.875) 4(-8.15,4.225) 5(-8.15,3.575) 6(-8.15,2.925) 7(-8.15,2.275) 8(-8.15,1.625) 9(-8.15,0.975) 10(-8.15,0.325) 11(-8.15,-0.325) 12(-8.15,-0.975) 13(-8.15,-1.625) 14(-8.15,-2.275) 15(-8.15,-2.925) 16(-8.15,-3.575) 17(-8.15,-4.225) 18(-8.15,-4.875) 19(-8.15,-5.525) 20(-8.15,-6.175) 41(8.15,-6.175) 42(8.15,-5.525) 43(8.15,-4.875) 44(8.15,-4.225) 45(8.15,-3.575) 46(8.15,-2.925) 47(8.15,-2.275) 48(8.15,-1.625) 49(8.15,-0.975) 50(8.15,-0.325) 51(8.15,0.325) 52(8.15,0.975) 53(8.15,1.625) 54(8.15,2.275) 55(8.15,2.925) 56(8.15,3.575) 57(8.15,4.225) 58(8.15,4.875) 59(8.15,5.525) 60(8.15,6.175)
  oval 0.45x1.95 smd: 21(-6.175,-8.15) 22(-5.525,-8.15) 23(-4.875,-8.15) 24(-4.225,-8.15) 25(-3.575,-8.15) 26(-2.925,-8.15) 27(-2.275,-8.15) 28(-1.625,-8.15) 29(-0.975,-8.15) 30(-0.325,-8.15) 31(0.325,-8.15) 32(0.975,-8.15) 33(1.625,-8.15) 34(2.275,-8.15) 35(2.925,-8.15) 36(3.575,-8.15) 37(4.225,-8.15) 38(4.875,-8.15) 39(5.525,-8.15) 40(6.175,-8.15) 61(6.175,8.15) 62(5.525,8.15) 63(4.875,8.15) 64(4.225,8.15) 65(3.575,8.15) 66(2.925,8.15) 67(2.275,8.15) 68(1.625,8.15) 69(0.975,8.15) 70(0.325,8.15) 71(-0.325,8.15) 72(-0.975,8.15) 73(-1.625,8.15) 74(-2.275,8.15) 75(-2.925,8.15) 76(-3.575,8.15) 77(-4.225,8.15) 78(-4.875,8.15) 79(-5.525,8.15) 80(-6.175,8.15)
  silkscreen extent -8.27,-6.75 6.75,7.07, body extent -7,-7 7,7, height 2.45
2012[0805] [mm] "Chip Resistor; Body 2.0 x 1.3 mm (LxW typ)"
  rect 1.3x1.5 smd: 1(-0.95,0) 2(0.95,0)
A#1 [mm] "Capacitor, Electrolytic, Radial; Body 4 x 5 mm (Dia.xH typ); Pin Spacing 1.5 mm (typ)"
  rect 1.25x1.25 hole 0.75: 1(-0.75,0)
  round 1.25 hole 0.75: 2(0.75,0)
  silkscreen extent -2,-2 2,2
A#2 [mm] "Capacitor, Electrolytic, Radial; Body 4 x 5 mm (Dia.xH typ); Pin Spacing 1.5 mm (typ)"
  rect 1.016x1.016 hole 0.75: 1(-0.75,0)
  round 1.016 hole 0.75: 2(0.75,0)
  silkscreen extent -2,-2 2,2
C0805 [mm] "Chip Capacitor; Body 2.0 x 1.2 mm (LxW typ)"
  rect 1.3x1.5 smd: 1(-0.95,0) 2(0.95,0)
  silkscreen extent -1.9,-0.65 -1.9,0.65
CAPPR5-5x5 [mm] "Capacitor, Electrolytic, Radial; Body 5 x 5 mm (Dia.xH typ); Pin Spacing 5 mm (typ)"
  rect 1.25x1.25 hole 0.75: 1(-2.5,0)
  round 1.35 hole 0.8: 2(2.5,0)
  silkscreen extent -2.26,-2.5 2.27,2.5
D008_N [mm] "SOIC, 8-Leads, Body 4.9x3.9mm, Pitch 1.27mm, IPC Medium Density"
  oval 2.2x0.6 smd: 1(-2.4,1.905) 2(-2.4,0.635) 3(-2.4,-0.635) 4(-2.4,-1.905) 5(2.4,-1.905) 6(2.4,-0.635) 7(2.4,0.635) 8(2.4,1.905)
  silkscreen extent -2.52,-2.5 0.9,2.88, body extent -1.95,-2.45 1.95,2.45, height 1.75
HC49/4H_SMX [mm] "Quartz Crystal, SM; Body 13.4 (inc. leads) x 4.9 mm (LxW max)"
  rect 5.5x2 smd: 1(-4.75,0) 2(4.75,0)
  silkscreen extent -5.7,-2.45 5.7,2.45
HDR2X5H [mm] "Connector; Header; 5x2 Position; Right Angle"
  rect 1.5x1.5 hole 0.9: 1(0,0)
  round 1.5 hole 0.9: 2(0,2.54) 3(2.54,0) 4(2.54,2.54) 5(5.08,0) 6(5.08,2.54) 7(7.62,0) 8(7.62,2.54) 9(10.16,0) 10(10.16,2.54)
  silkscreen extent -1.27,-6.35 11.43,-1.27
MHDR2X2 [mm] "Connector; Header; 2x2 Position"
  rect 1x1 hole 0.6: 1(0,0)
  round 1 hole 0.6: 2(0,1.27) 3(1.27,0) 4(1.27,1.27)
  silkscreen extent -0.9,-0.9 2.17,2.17
MHDR2X3 [mm] "Connector; Header; 3x2 Position"
  rect 1x1 hole 0.6: 1(0,0)
  round 1 hole 0.6: 2(0,1.27) 3(1.27,0) 4(1.27,1.27) 5(2.54,0) 6(2.54,1.27)
  silkscreen extent -0.9,-0.9 3.44,2.17
MHDR2X4 [mm] "Connector; Header; 4x2 Position"
  rect 1x1 hole 0.6: 1(0,0)
  round 1 hole 0.6: 2(0,1.27) 3(1.27,0) 4(1.27,1.27) 5(2.54,0) 6(2.54,1.27) 7(3.81,0) 8(3.81,1.27)
  silkscreen extent -0.9,-0.9 4.71,2.17
SMB [mm] "DO-214-AA/SMB; 2 C-Bend Leads; Body 5.3 x 3.6 mm, inc. leads (LxW)"
  rect 2.3x2.3 smd: 1(-2.25,0) 2(2.25,0)
  silkscreen extent -3.8,-1.55 4.1,1.55
SMD-6 [mm]
  rect 1.5x1.5 smd: 1(0,0) 2(0,-2.54) 3(0,-5.08) 4(7.62,-5.08) 5(7.62,-2.54) 6(7.62,0)
  silkscreen extent 1.16,-7.24 6.46,2.16
SO8_N [mm] "SOIC, 8-Leads, Body 4.9x3.9mm, Pitch 1.27mm, IPC Medium Density"
  oval 2.2x0.6 smd: 1(-2.4,1.905) 2(-2.4,0.635) 3(-2.4,-0.635) 4(-2.4,-1.905) 5(2.4,-1.905) 6(2.4,-0.635) 7(2.4,0.635) 8(2.4,1.905)
  silkscreen extent -2.53,-2.5 0.9,2.88, body extent -1.95,-2.45 1.95,2.45, height 1.75
SO14_N [mm] "SOIC, 14-Leads, Body 8.7x3.9mm, Pitch 1.27mm, IPC Medium Density"
  oval 2.2x0.6 smd: 1(-2.4,3.81) 2(-2.4,2.54) 3(-2.4,1.27) 4(-2.4,0) 5(-2.4,-1.27) 6(-2.4,-2.54) 7(-2.4,-3.81) 8(2.4,-3.81) 9(2.4,-2.54) 10(2.4,-1.27) 11(2.4,0) 12(2.4,1.27) 13(2.4,2.54) 14(2.4,3.81)
  silkscreen extent -2.53,-4.4 0.9,4.78, body extent -1.95,-4.33 1.95,4.33, height 1.75
SOT23A [mm] "SOT-23; 3 Leads; Body 3.0 x 2.5 mm, inc. leads (LxW max)"
  rect 0.9x0.95 smd: 1(-0.95,-1.175) 2(0.95,-1.175) 3(0,1.175)
  silkscreen extent -2.07,-1.3 1.3,1.18
SOT89 [mm] "SOT-89; Body 4.6 x 4.25 mm, inc. leads (LxW max)"
  oct 1.9x3.3 smd: 0(0,1.388)
  rect 0.7x1.35 smd: 1(-1.5,-1.388) 3(1.5,-1.388)
  rect 0.7x1.8 smd: 2(0,-1.162)
  silkscreen extent -3.27,-2.51 2.5,3.49
SOT-23B [mm] "SOT-23; 3 Leads; Body 3.0 x 2.6 mm, inc. leads (LxW max)"
  rect 0.9x0.95 smd: 1(-0.95,-1.25) 2(0.95,-1.25) 3(0,1.25)
  silkscreen extent -2.08,-1.37 1.3,1.25
TO228P960-3_4L [mm] "D-PAK, 4-Leads, Body 6.1x6mm, Pitch 2.28mm, Lead Span 9.7mm, IPC High Density"
  rect 1.8x0.9 smd: 1(-4.2,2.28) 3(-4.2,-2.28)
  rect 6.2x5.85 smd: 4(2,0)
  silkscreen extent -4.32,-3.1 -1.5,3.4, body extent -2.2,-3.08 4,3.08, height 2.03
TO228P970-3_4L [mm] "D-PAK, 4-Leads, Body 6.1x6.5mm, Pitch 2.28mm, Lead Span 9.7mm, IPC High Density"
  rect 1.6x0.9 smd: 1(-4.3,2.28) 3(-4.3,-2.28)
  rect 6.6x6.75 smd: 2(1.8,0)
  silkscreen extent -4.43,-3.35 -1.9,3.4, body extent -2.55,-3.35 3.65,3.35, height 2.38

## Part data
1GM Q1 Q2 Q3 Q4 Q5 Q6 Q7 Q8 Q9 Q10 Q11 Q12 Q13 Q14 Q15 Q16 Q17: library part NPN, "NPN Bipolar Transistor"
C1 C2 C3 C4 C5 C6 C7 C8 C9 C10 C11 C12 C13 C14 C15 C16 C17 C18 C19 C20 C21 C22 C23 C24 C25 C26 C27 C28 C29 C30 C31 C32 C33 C34 C35 C36 C37 C38 C39 C40 C41 C42 C43 C44 C45 C46 C47 C48 C49 C50 C51 C52 C53 C54 C55 C56 C57 C58 C59 C60 C61 C62 C63 C64 C65 C66 C67 C68 C69 C70 C71 C72 C73 C74 C75 C76 C77 C78 C79 C80 C81 C82 C83 C84 C85 C86 C87 C88 C89 C90 C91 C92 C93 C94 C95 C96 C97 C98 C99 C100 C101 C102 C103 C104 C105 C106 C107 C108 C109 C110 C111 C112 C113 C114 C115 C116 C117 C118 C119 C120 C121 C122 C123 C124 C125 C126 C127 C128 C129 C130 C131 C132 C133 C134 C135 C136 C137 C138 C139: "Capacitor"
C230 C236 C635 C636 C820 C903 C906: "Polarized Capacitor (Radial)"
D2 D5 D6: library part BAV99
D800 DZ1 DZ2 DZ3: library part "D Zener", "Zener Diode"
OC400 OC401 OC402: library part Optoisolator1, "4-Pin Phototransistor Optocoupler"
P200 P201 P203 P400 P401 P601: "Header, 2-Pin, Dual row"
P202 P204: library part MHDR2X2, "Header, 2-Pin, Dual row"
P402 P600 P602 P603: "Header, 3-Pin, Dual row"
P604: "Header, 4-Pin, Dual row"
P900: "Header, 5-Pin, Dual row, Right Angle"
q203 Q209 Q400 Q401 Q900 Q908 QA1 QA2 QA3 QA4 QA5 QA6 QA7 QA8 QA9 QA10 QA11 QA12 QA13 QA14 QA15 QA16 QA17 QA18 QA19 QA20 QA21 QA22: library part PNP, "PNP Bipolar Transistor"
R1 R2 R3 R4 R5 R6 R7 R8 R9 R10 R11 R12 R13 R14 R15 R16 R17 R18 R19 R20 R21 R22 R23 R24 R25 R26 R27 R28 R29 R30 R31 R32 R33 R34 R35 R36 R37 R38 R39 R40 R41 R42 R43 R44 R45 R46 R47 R48 R49 R50 R51 R52 R53 R54 R55 R56 R57 R58 R59 R60 R61 R62 R63 R64 R65 R66 R67 R68 R69 R70 R71 R72 R73 R74 R75 R76 R77 R78 R79 R80 R81 R82 R83 R84 R85 R86 R87 R88 R89 R90 R91 R92 R93 R94 R95 R96 R97 R98 R99 R100 R101 R102 R103 R104 R105 R106 R107 R108 R109 R110 R111 R112 R113 R114 R115 R116 R117 R118 R119 R120 R121 R122 R123 R124 R125 R126 R127 R128 R129 R130 R131 R132 R133 R134 R135 R136 R137 R138 R139 R140 R141 R142 R143 R144 R145 R146 R147 R148 R149 R150 R151 R152 R153 R154 R155 R156 R157 R158 R159 R160 R161 R162 R163 R164 R165 R166 R167 R168 R169 R170 R171 R172 R173 R174 R175 R176 R177 R178 R179 R180 R181 R182 R183 R184 R185 R186 R187 R188 R189 R190 R191 R192 R193 R194 R195 R196 R197 R198 R199 R200 R201 R202 R203 R204 R205 R206 R207 R208 R209 R210 R211 R212 R213 R214 R215 R216 R217 R218 R219 R220 R221 R222 R223 R224 R225 R226 R227 R228 R229 R230 R231 R232 R233 R234 R235 R236 R237 R238 R239 R240 R241 R242 R243 R244 R245 R246 R247 R248 R249 R250 R251 R252 R253 R254 R255 R256 R257 R258 R259 R260 R261 R262 R263 R264 R265 R266 R267 R268 R269 R270 R271 R272 R273 R274 R275 R276 R277 R278 R279 R280 R281 R282 R283 R284: "Resistor"
U200 U900: library part 74LVQ14M, "Hex Schmitt Inverter"
U201 U203 U204 U601 U602 U603: "Dual Low-Power Operational Amplifier"
U202 U207: "Quad Single-Supply Comparator"
U205 U206 u604 u605 U800 U803: library part µA78L12CLP, "Positive-Voltage Regulator"
U400: "Quad 2-Input NOR Gate"
U401: "Dual D-Type Flip-Flop"
U402: "Precision Timer"
U600: library part MC34172D, "Low-Power Dual Bipolar Operational Amplifier"
U801: "16-Bit Microcontroller"
XT800: "Crystal Oscillator"

## Free pads (board coordinates)
  round 30 hole 15: 0(-7630,-1155) 0(-7625,-1970) 0(-7555,-1600) 0(-7525,-2650) 0(-7485,-2595) 0(-7465,-2150) 0(-7410,-1540) 0(-7335,-205) 0(-7280,-2490) 0(-7270,-1275) 0(-7270,-1010) 0(-7270,-875) 0(-7260,-505) 0(-7245,-2640) 0(-7210,-2735) 0(-7180,-2490) 0(-7180,-680) 0(-7055,-2590) 0(-7055,-250) 0(-7010,-2410) 0(-7000,-1160) 0(-6990,-2330) 0(-6990,-1485) 0(-6985,-2190) 0(-6970,-1620) 0(-6900,-635) 0(-6895,-1065) 0(-6860,-1025) 0(-6855,-2545) 0(-6855,-1165) 0(-6845,-2500) 0(-6830,-870) 0(-6825,-1625) 0(-6825,-1115) 0(-6795,-2470) 0(-6785,-1040) 0(-6750,-1010) 0(-6745,-1075) 0(-6725,-940) 0(-6695,-2500) 0(-6695,-1905) 0(-6665,-1650) 0(-6665,-610) 0(-6660,-2235) 0(-6660,-1505) 0(-6625,-430) 0(-6600,-1650) 0(-6590,-1490) 0(-6570,-1870) 0(-6565,-1950) 0(-6540,-2415) 0(-6505,-2275) 0(-6485,-510) 0(-6470,-900) 0(-6445,-1535) 0(-6435,-1680) 0(-6435,-570) 0(-6400,-1870) 0(-6380,-570) 0(-6340,-960) 0(-6310,-1680) 0(-6310,-910) 0(-6305,-2445) 0(-6300,-1455) 0(-6265,-1010) 0(-6250,-1680) 0(-6245,-2445) 0(-6240,-1455) 0(-6235,-590) 0(-6220,-2575) 0(-6205,-225) 0(-6180,-330) 0(-6165,-1655) 0(-6155,-2545) 0(-6145,-2160) 0(-6135,-2445) 0(-6130,-615) 0(-6125,-1315) 0(-6105,-880) 0(-6100,-2550) 0(-6100,-820) 0(-6085,-1800) 0(-6085,-1030) 0(-6050,-1510) 0(-6040,-1750) 0(-6035,-2400) 0(-6005,-325) 0(-5995,-1940) 0(-5965,-1385) 0(-5950,-2060) 0(-5905,-960) 0(-5900,-1605) 0(-5880,-600) 0(-5875,-735) 0(-5855,-2215) 0(-5825,-2120) 0(-5825,-2070) 0(-5815,-2460) 0(-5815,-2250) 0(-5795,-695) 0(-5765,-655) 0(-5760,-360) 0(-5720,-1665) 0(-5715,-775) 0(-5700,-1000) 0(-5685,-3125) 0(-5655,-660) 0(-5650,-705) 0(-5620,-235) 0(-5590,-1910) 0(-5585,-845) 0(-5580,-690) 0(-5570,-440) 0(-5555,-2890) 0(-5555,-2850) 0(-5535,-920) 0(-5520,-2595) 0(-5475,-345) 0(-5465,-1095) 0(-5435,-1640) 0(-5430,-145) 0(-5420,-3250) 0(-5420,-440) 0(-5410,-1415) 0(-5380,-1375) 0(-5370,-1680) 0(-5370,-520) 0(-5350,-760) 0(-5340,-1195) 0(-5330,-2760) 0(-5310,-1530) 0(-5305,-860) 0(-5300,-760) 0(-5270,-825) 0(-5230,-1485) 0(-5210,-470) 0(-5205,-1265) 0(-5135,-3165) 0(-5120,-470) 0(-5100,-2195) 0(-5080,-2620) 0(-5080,-950) 0(-5070,-1315) 0(-5030,-715) 0(-5010,-2705) 0(-5005,-2095) 0(-4995,-540) 0(-4990,-1730) 0(-4960,-1050) 0(-4920,-2355) 0(-4920,-2290) 0(-4915,-1530) 0(-4885,-3110) 0(-4875,-1435) 0(-4865,-2770) 0(-4845,-1000) 0(-4830,-2360) 0(-4810,-1490) 0(-4800,-2495) 0(-4800,-2290) 0(-4785,-1875) 0(-4785,-1560) 0(-4755,-385) 0(-4730,-430) 0(-4705,-1505) 0(-4635,-3255) 0(-4560,-125) 0(-4510,-165) 0(-4400,-720) 0(-4280,-2125) 0(-4280,-745) 0(-4240,-1925) 0(-4240,-1885) 0(-4240,-1845) 0(-4240,-1805) 0(-4240,-1765) 0(-4240,-1725) 0(-4240,-1685) 0(-4205,-1665) 0(-4200,-1930) 0(-4165,-1665) 0(-4160,-1930) 0(-4140,-2175) 0(-4125,-1665) 0(-4120,-2365) 0(-4120,-1930) 0(-4095,-2630) 0(-4095,-2565) 0(-4085,-1665) 0(-4080,-1930) 0(-4045,-1665) 0(-4040,-1930) 0(-4005,-2795) 0(-4005,-1665) 0(-4000,-1930) 0(-3945,-885) 0(-3910,-1540) 0(-3835,-960) 0(-3820,-2405) 0(-3785,-1695) 0(-3745,-1485) 0(-3695,-2635) 0(-3675,-915) 0(-3670,-840) 0(-3655,-1930) 0(-3640,-1765) 0(-3635,-1605) 0(-3635,-1420) 0(-3635,-1065) 0(-3635,-965) 0(-3630,-1195) 0(-3630,-1145) 0(-3585,-520) 0(-3580,-1555) 0(-3575,-2265) 0(-3525,-2900) 0(-3525,-2800) 0(-3500,-1835) 0(-3480,-2105) 0(-3475,-2945) 0(-3475,-2800) 0(-3450,-1980) 0(-3440,-810) 0(-3440,-535) 0(-3415,-1805) 0(-3375,-1985) 0(-3345,-1555) 0(-3275,-2105) 0(-3275,-755) 0(-3275,-680) 0(-3260,-2755) 0(-3260,-1430) 0(-3210,-2555) 0(-3210,-1730) 0(-3205,-2765) 0(-3205,-1655) 0(-3190,-2615) 0(-3160,-2720) 0(-3130,-2100) 0(-3100,-1640) 0(-3095,-2760) 0(-3090,-2270) 0(-3070,-2610) 0(-3035,-2725) 0(-3005,-2615) 0(-2990,-1960) 0(-2930,-2625) 0(-2710,-2860) 0(-2650,-3160) 0(-2635,-1985) 0(-2580,-2555) 0(-2550,-1595) 0(-2545,-1335) 0(-2525,-2710) 0(-2525,-2615) 0(-2525,-2535) 0(-2490,-1360) 0(-2485,-1615) 0(-2475,-2805) 0(-2460,-2685) 0(-2450,-1335) 0(-2435,-2620) 0(-2410,-1555) 0(-2395,-1335) 0(-2380,-1645) 0(-2360,-1565) 0(-2345,-1465) 0(-2335,-1315) 0(-2320,-1260) 0(-2315,-1605) 0(-2310,-1555) 0(-2265,-2715) 0(-2260,-1420) 0(-2205,-1470) 0(-2190,-2305) 0(-2185,-2870) 0(-2185,-1110) 0(-2175,-1680) 0(-2170,-1195) 0(-2130,-1110) 0(-2100,-2980) 0(-2100,-1550) 0(-2050,-1240) 0(-2025,-1550) 0(-2005,-1195) 0(-1950,-1880) 0(-1950,-1160) 0(-1925,-1995) 0(-1900,-1160) 0(-1895,-2800) 0(-1895,-2745) 0(-1865,-1620) 0(-1845,-2300) 0(-1835,-1480) 0(-1805,-1350) 0(-1795,-2035) 0(-1720,-2765) 0(-1660,-1935) 0(-1525,-2540) 0(-1510,-2155) 0(-1485,-2570) 0(-1475,-2980) 0(-1475,-2085) 0(-1445,-2035) 0(-1440,-2450) 0(-1405,-2505) 0(-1385,-2790) 0(-1360,-2720) 0(-1245,-2210) 0(-1215,-2610) 0(-1140,-2110) 0(-1130,-2465)
  round 60 hole 30: 1(-4345,-2285) 2(-7325,-2700) 3(-6915,-2705) 4(-6930,-3060) 5(-7320,-3065) 6(-5790,-3045) 7(-5415,-3045) 8(-5410,-2740) 9(-5775,-2740)